# EAGLE board Sparkfun_LilyPad-Switched-Battery (EAGLE 9.6.2)
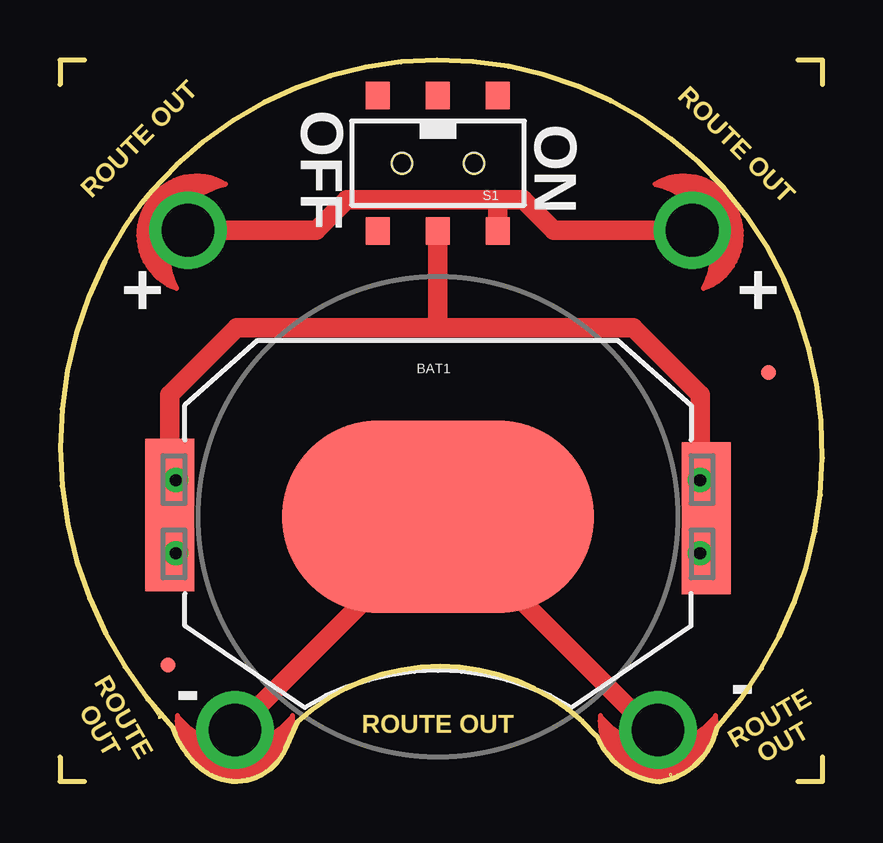
[diagram p0: board, top side]
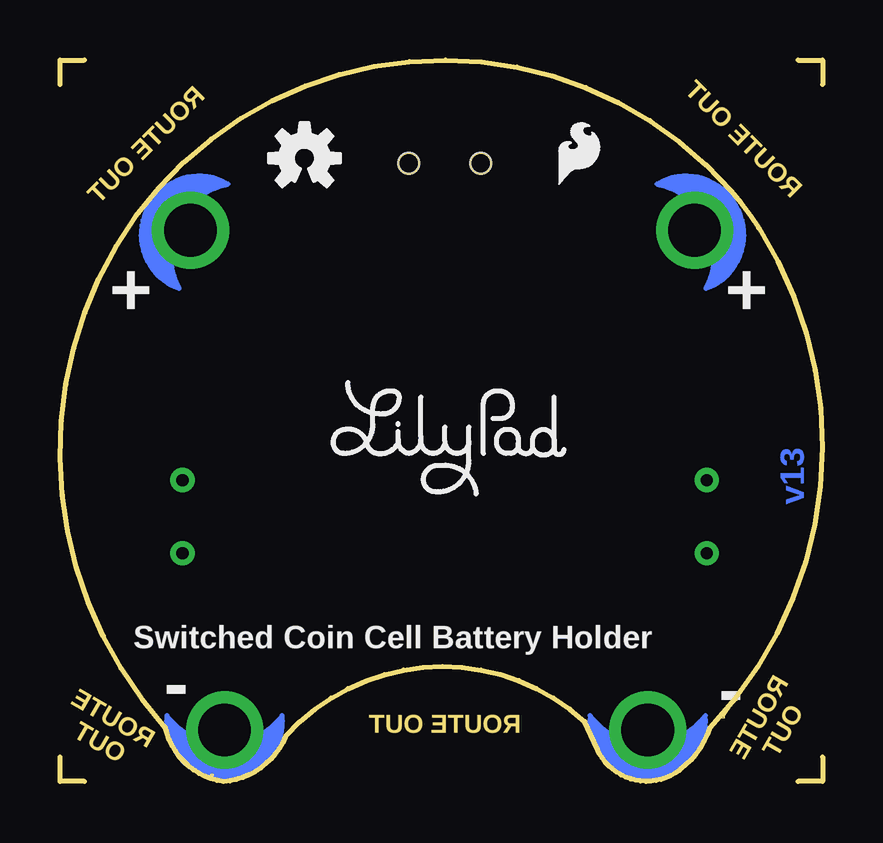
[diagram p1: board, bottom side, seen from below]

Size 31.78 x 30.07 mm. Coordinates in mm from the lower left corner, seen from the top.
Outline: 5.97,0.48 arc103 9.4,1.37
Outline: 6,0.52 arc180 5.94,0.44
Outline: 9.44,1.35 arc180 9.35,1.39 arc-180 9.44,1.35
Outline: 24.96,0.01 arc-63 22.38,1.88 arc63 24.96,0.01
Outline: 9.44,1.35 arc-180 9.35,1.39 arc180 9.44,1.35
Outline: 9.91,2.51 arc-90 22.35,1.93 arc90 9.91,2.51
Outline: 29.44,22.32 arc108 3.81,24.61
Outline: 3.77,24.64 arc180 3.85,24.57
Outline: 24.96,0.01 arc70 27.38,2.26
Outline: 27.38,2.26 arc72 29.44,22.32
Outline: 3.81,24.61 arc9 2.67,23.08
Outline: 3.85,24.57 arc180 3.77,24.64
Outline: 2.62,23.11 arc180 2.71,23.06
Outline: 2.67,23.08 arc76 4.7,2.26
Outline: 2.71,23.06 arc180 2.62,23.11
Outline: 4.7,2.26 arc35 5.97,0.48
Outline: 5.94,0.44 arc180 6,0.52
Outline: 5.97,0.48 arc103 9.4,1.37
Outline: 6,0.52 arc180 5.94,0.44
Outline: 25.45,0.24 arc180 25.44,0.34
Outline: 9.4,1.37 9.91,2.51
Outline: 29.44,22.32 arc108 3.81,24.61
Outline: 3.77,24.64 arc180 3.85,24.57
Outline: 24.96,0.01 arc70 27.38,2.26
Outline: 25.43,0.34 arc180 25.45,0.24
Outline: 27.38,2.26 arc72 29.44,22.32
Outline: 3.81,24.61 arc9 2.67,23.08
Outline: 3.85,24.57 arc180 3.77,24.64
Outline: 2.62,23.11 arc180 2.71,23.06
Outline: 2.67,23.08 arc76 4.7,2.26
Outline: 2.71,23.06 arc180 2.62,23.11
Outline: 4.7,2.26 arc35 5.97,0.48
Outline: 5.94,0.44 arc180 6,0.52
Outline: 3.63,3.4 4.14,2.69
Outline: 1.02,30.07 0,30.07 0,29.05
Outline: 30.76,30.07 31.78,30.07 31.78,29.05
Outline: 31.78,1.04 31.78,0.02 30.76,0.02
Outline: 1.02,0.02 0,0.02 0,1.04
Outline: 9.95,2.49 arc180 9.86,2.53 arc-180 9.95,2.49
Outline: 9.87,2.55 arc180 9.94,2.47 arc-180 9.87,2.55
Outline: 27.36,2.12 arc180 27.25,2.14 arc-180 27.36,2.12
Outline: 27.27,2.16 arc180 27.34,2.1 arc-180 27.27,2.16
Outline: 4.66,2.22 arc180 4.74,2.29 arc-180 4.66,2.22
Outline: 4.75,2.27 arc180 4.65,2.24 arc-180 4.75,2.27
Outline: 6.85,0 arc180 6.76,0.04 arc-180 6.85,0
Outline: 4.1,2.66 arc180 4.18,2.72 arc-180 4.1,2.66
Outline: 3.67,3.43 arc180 3.59,3.37 arc-180 3.67,3.43
Outline: 4.19,2.7 arc180 4.09,2.67 arc-180 4.19,2.7
Outline: circle at 14.25,25.75 radius 0.42
Outline: circle at 17.25,25.75 radius 0.42
Outline: circle at 14.25,25.75 radius 0.42
Outline: circle at 17.25,25.75 radius 0.42
Copper layers (1*16): Top 0.035mm / dielectric 1.5mm / Bottom 0.035mm
Design rules "SparkFun-2-layer-STANDARD *": minimum track width 10mil, minimum drill 20mil, track to track 10mil, track to pad 8mil, pad to pad 8mil, via to via 10mil, smd to smd 8mil, copper to edge 8mil, drill to drill 8mil, minimum pad ring 10mil, minimum via ring 10mil, stop-mask expansion 4mil, vias tented up to drill 25mil, thermal gap 10mil
Net classes: 1 VCC: width 0.203 mm

## Footprints (pad centres in the part's own frame; a part is rotated, then mirrored left to right if it is on the bottom)
BATTCON_20MM_4LEGS = smd 13 x 8: NEGATIVE 0,0 | smd 2.032 x 3.175: POSITIVE@1 -11.176,1.651; POSITIVE@2 -11.176,-1.524; POSITIVE@3 11.176,1.524; POSITIVE@4 11.176,-1.651
PETAL-SMALL-2SIDE = drill 2.2: 1 0,0
MICRO-FIDUCIAL = smd 0.635 x 0.635: 1 0,0
AYZ0202 = smd 1 x 1.15: 1 -2.5,2.825; 2 0,2.825; 3 2.5,2.825; 4 -2.5,-2.825; 5 0,-2.825; 6 2.5,-2.825 | hole 0.85: 1.5,0; -1.5,0

## Placement (x,y rotation side)
BAT1  20mm coincell  [BATTCON_20MM_4LEGS]  15.75,11.04 0 top
BATB-  SEWTAP6  [PETAL-SMALL-2SIDE]  7.29,2.15 0 top
BATB-2  SEWTAP6  [PETAL-SMALL-2SIDE]  24.92,2.15 0 top
BATT+  SEWTAP6  [PETAL-SMALL-2SIDE]  5.33,22.98 245 top
BATT+2  SEWTAP6  [PETAL-SMALL-2SIDE]  26.34,22.98 115 top
FD1  FIDUCIALUFIDUCIAL  [MICRO-FIDUCIAL]  29.53,17.06 0 top
FD2  FIDUCIALUFIDUCIAL  [MICRO-FIDUCIAL]  4.5,4.87 0 top
FRAME1  FRAME-LETTER  [CREATIVE_COMMONS]  -9.22,-9.68 0 top  (outside the outline)
LOGO1  SFE_LOGO_FLAME.1_INCH  [SFE_LOGO_FLAME_.1]  11.3,24.56 0 bottom
LOGO2  OSHW-LOGOS  [OSHW-LOGO-S]  21.59,25.98 0 bottom
S1  [AYZ0202]  15.75,25.78 180 top
U$1  REVISION  [REVISION]  2.17,-12.26 0 top  (outside the outline)
U$3  [LOGO-LILYPAD]  15.54,14.65 0 bottom

## Library data of the parts
BAT1 = SparkFun-Electromechanical; PROD_ID: BATT-10373
BATB- BATB-2 BATT+ BATT+2 U$3 = LilyPad-Wearables
FD1 FD2 FRAME1 LOGO1 LOGO2 U$1 = SparkFun-Aesthetics
S1 = SparkFun-Electromechanical; PROD_ID: SWCH-08179; SF_ID: COM-00597

## Nets
GND: BAT1.NEGATIVE BATB-2.1 BATB-.1
N$1: BAT1.POSITIVE@1 BAT1.POSITIVE@2 BAT1.POSITIVE@3 BAT1.POSITIVE@4 S1.2
N$2: BATT+2.1 BATT+.1 S1.1

## Tracks (layer width: path | path; a pad name or v marks a point on that pad's centre or on a via)
GND
  Top 0.813: BATB-.1 15.75,10.61 BAT1.NEGATIVE 24.64,2.15 BATB-2.1
N$1  (via drill 0.51)
  Top 0.254: BAT1.POSITIVE@3 v26.67,12.57
  Top 0.813: 15.75,18.92 7.37,18.92 4.57,16.12 BAT1.POSITIVE@1 | 15.75,18.92 23.88,18.92 26.67,16.12 v26.67,12.57 v26.67,9.52 26.92,9.52 27.43,9.01 27.43,9.9 | BAT1.POSITIVE@2 v4.83,9.52 4.83,12.44 | S1.2 15.75,18.92 | BAT1.POSITIVE@1 4.57,12.31 4.32,12.06 4.32,12.44 | 4.83,12.44 BAT1.POSITIVE@1 | 4.83,12.44 v4.83,12.57 | 27.43,10.28 27.43,9.9 | 27.43,9.9 BAT1.POSITIVE@4
N$2
  Top 0.813: BATT+.1 10.67,22.98 11.94,24.25 18.29,24.25 | 18.29,24.25 19.3,24.25 20.57,22.98 BATT+2.1 | S1.1 18.25,24.21 18.29,24.25

## Text on the board
Bottom: v13
Dimension: ROUTE OUT | ROUTE OUT | ROUTE / OUT | ROUTE OUT | ROUTE / OUT
tPlace: OFF | ON | + | + | - | -
bPlace: + | + | Switched Coin Cell Battery Holder | - | -
Measures: All Units Inches
tDocu: Jim Lindblom | M. West | Board Thickness: 0.8mm | Purple Solder Mask